# EAGLE board L1panel (EAGLE 7.7.0)
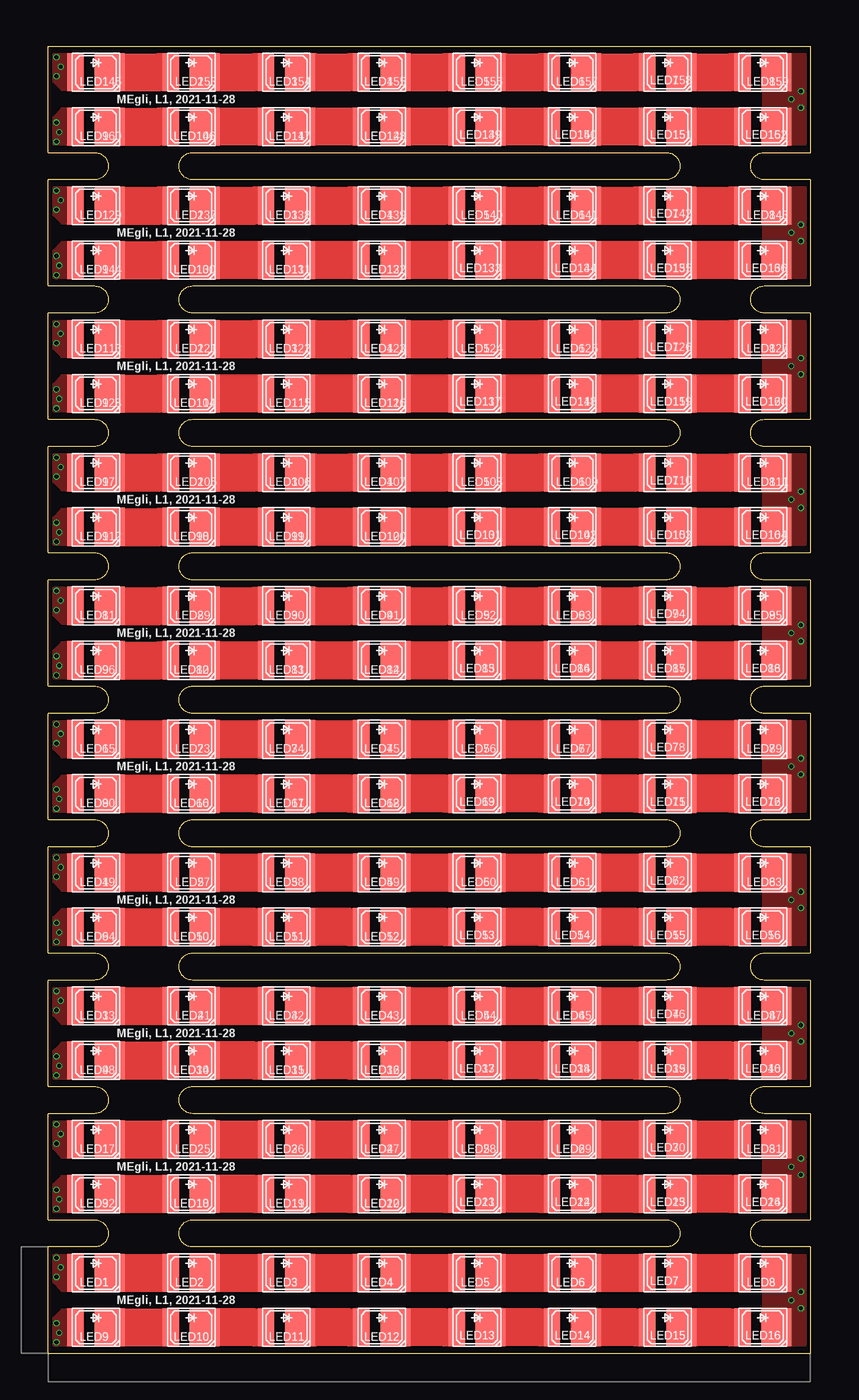
[diagram p0: board, top side]
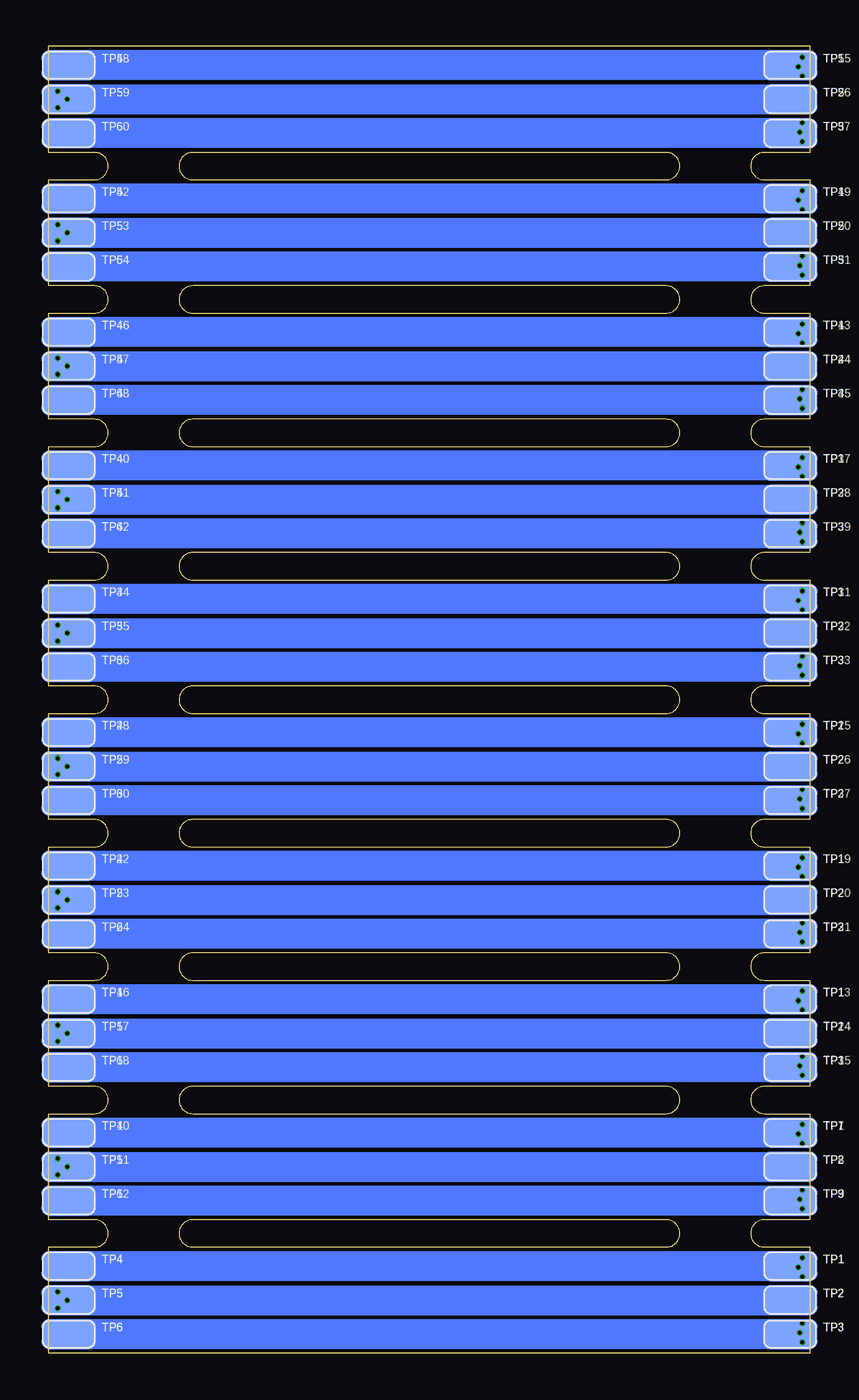
[diagram p1: board, bottom side, seen from below]

Size 56 x 96 mm. Coordinates in mm from the lower left corner, seen from the top.
Outline: 0,0 56,0 56,7.8 52.6,7.8 arc-90 51.6,8.8 arc-90 52.6,9.8 56,9.8 56,17.6 52.6,17.6 arc-90 51.6,18.6 arc-90 52.6,19.6 56,19.6 56,27.4 52.6,27.4 arc-90 51.6,28.4 arc-90 52.6,29.4 56,29.4 56,37.2 52.6,37.2 arc-90 51.6,38.2 arc-90 52.6,39.2 56,39.2 56,47 52.6,47 arc-90 51.6,48 arc-90 52.6,49 56,49 56,56.8 52.6,56.8 arc-90 51.6,57.8 arc-90 52.6,58.8 56,58.8 56,66.6 52.6,66.6 arc-90 51.6,67.6 arc-90 52.6,68.6 56,68.6 56,76.4 52.6,76.4 arc-90 51.6,77.4 arc-90 52.6,78.4 56,78.4 56,86.2 52.6,86.2 arc-90 51.6,87.2 arc-90 52.6,88.2 56,88.2 56,96 0,96 0,88.2 3.4,88.2 arc-90 4.4,87.2 arc-90 3.4,86.2 0,86.2 0,78.4 3.4,78.4 arc-90 4.4,77.4 arc-90 3.4,76.4 0,76.4 0,68.6 3.4,68.6 arc-90 4.4,67.6 arc-90 3.4,66.6 0,66.6 0,58.8 3.4,58.8 arc-90 4.4,57.8 arc-90 3.4,56.8 0,56.8 0,49 3.4,49 arc-90 4.4,48 arc-90 3.4,47 0,47 0,39.2 3.4,39.2 arc-90 4.4,38.2 arc-90 3.4,37.2 0,37.2 0,29.4 3.4,29.4 arc-90 4.4,28.4 arc-90 3.4,27.4 0,27.4 0,19.6 3.4,19.6 arc-90 4.4,18.6 arc-90 3.4,17.6 0,17.6 0,9.8 3.4,9.8 arc-90 4.4,8.8 arc-90 3.4,7.8 0,7.8 0,0
Outline: 45.4,7.8 10.6,7.8 arc-90 9.6,8.8 arc-90 10.6,9.8 45.4,9.8 arc-90 46.4,8.8 arc-90 45.4,7.8
Outline: 45.4,17.6 10.6,17.6 arc-90 9.6,18.6 arc-90 10.6,19.6 45.4,19.6 arc-90 46.4,18.6 arc-90 45.4,17.6
Outline: 45.4,27.4 10.6,27.4 arc-90 9.6,28.4 arc-90 10.6,29.4 45.4,29.4 arc-90 46.4,28.4 arc-90 45.4,27.4
Outline: 45.4,37.2 10.6,37.2 arc-90 9.6,38.2 arc-90 10.6,39.2 45.4,39.2 arc-90 46.4,38.2 arc-90 45.4,37.2
Outline: 45.4,47 10.6,47 arc-90 9.6,48 arc-90 10.6,49 45.4,49 arc-90 46.4,48 arc-90 45.4,47
Outline: 45.4,56.8 10.6,56.8 arc-90 9.6,57.8 arc-90 10.6,58.8 45.4,58.8 arc-90 46.4,57.8 arc-90 45.4,56.8
Outline: 45.4,66.6 10.6,66.6 arc-90 9.6,67.6 arc-90 10.6,68.6 45.4,68.6 arc-90 46.4,67.6 arc-90 45.4,66.6
Outline: 45.4,76.4 10.6,76.4 arc-90 9.6,77.4 arc-90 10.6,78.4 45.4,78.4 arc-90 46.4,77.4 arc-90 45.4,76.4
Outline: 45.4,86.2 10.6,86.2 arc-90 9.6,87.2 arc-90 10.6,88.2 45.4,88.2 arc-90 46.4,87.2 arc-90 45.4,86.2
Copper layers (1*16): Top 0.035mm / dielectric 1.6mm / Bottom 0.035mm
Design rules "jlcpcb-2layers *": minimum track width 5mil, minimum drill 0.3mm, track to track 5mil, track to pad 5mil, pad to pad 5mil, via to via 5mil, smd to smd 5mil, copper to edge 0.2mm, drill to drill 6mil, minimum pad ring 10mil, minimum via ring 3mil, stop-mask expansion 4mil, vias tented up to drill 0.4mm, thermal gap 10mil
tRestrict: 80 lines

## Footprints (pad centres in the part's own frame; a part is rotated, then mirrored left to right if it is on the bottom)
LED_JE2835 = smd 1.2 x 2.8: 1 -1.5,0 | smd 2.2 x 2.8: 2 1,0
PAD_4X2.2MM = smd 4 x 2.2: 1 0,0

## Placement (x,y rotation side)
LED1  [LED_JE2835]  3.5,5.9 0 top
LED2  [LED_JE2835]  10.5,5.9 0 top
LED3  [LED_JE2835]  17.5,5.9 0 top
LED4  [LED_JE2835]  24.5,5.9 0 top
LED5  [LED_JE2835]  31.5,5.9 0 top
LED6  [LED_JE2835]  38.5,5.9 0 top
LED7  [LED_JE2835]  45.5,5.9 0 top
LED8  [LED_JE2835]  52.5,5.9 0 top
LED9  [LED_JE2835]  3.5,1.9 0 top
LED10  [LED_JE2835]  10.5,1.9 0 top
LED11  [LED_JE2835]  17.5,1.9 0 top
LED12  [LED_JE2835]  24.5,1.9 0 top
LED13  [LED_JE2835]  31.5,1.9 0 top
LED14  [LED_JE2835]  38.5,1.9 0 top
LED15  [LED_JE2835]  45.5,1.9 0 top
LED16  [LED_JE2835]  52.5,1.9 0 top
LED17  [LED_JE2835]  3.5,15.7 0 top
LED18  [LED_JE2835]  10.5,11.7 0 top
LED19  [LED_JE2835]  17.5,11.7 0 top
LED20  [LED_JE2835]  24.5,11.7 0 top
LED21  [LED_JE2835]  31.5,11.7 0 top
LED22  [LED_JE2835]  38.5,11.7 0 top
LED23  [LED_JE2835]  45.5,11.7 0 top
LED24  [LED_JE2835]  52.5,11.7 0 top
LED25  [LED_JE2835]  10.5,15.7 0 top
LED26  [LED_JE2835]  17.5,15.7 0 top
LED27  [LED_JE2835]  24.5,15.7 0 top
LED28  [LED_JE2835]  31.5,15.7 0 top
LED29  [LED_JE2835]  38.5,15.7 0 top
LED30  [LED_JE2835]  45.5,15.7 0 top
LED31  [LED_JE2835]  52.5,15.7 0 top
LED32  [LED_JE2835]  3.5,11.7 0 top
LED33  [LED_JE2835]  3.5,25.5 0 top
LED34  [LED_JE2835]  10.5,21.5 0 top
LED35  [LED_JE2835]  17.5,21.5 0 top
LED36  [LED_JE2835]  24.5,21.5 0 top
LED37  [LED_JE2835]  31.5,21.5 0 top
LED38  [LED_JE2835]  38.5,21.5 0 top
LED39  [LED_JE2835]  45.5,21.5 0 top
LED40  [LED_JE2835]  52.5,21.5 0 top
LED41  [LED_JE2835]  10.5,25.5 0 top
LED42  [LED_JE2835]  17.5,25.5 0 top
LED43  [LED_JE2835]  24.5,25.5 0 top
LED44  [LED_JE2835]  31.5,25.5 0 top
LED45  [LED_JE2835]  38.5,25.5 0 top
LED46  [LED_JE2835]  45.5,25.5 0 top
LED47  [LED_JE2835]  52.5,25.5 0 top
LED48  [LED_JE2835]  3.5,21.5 0 top
LED49  [LED_JE2835]  3.5,35.3 0 top
LED50  [LED_JE2835]  10.5,31.3 0 top
LED51  [LED_JE2835]  17.5,31.3 0 top
LED52  [LED_JE2835]  24.5,31.3 0 top
LED53  [LED_JE2835]  31.5,31.3 0 top
LED54  [LED_JE2835]  38.5,31.3 0 top
LED55  [LED_JE2835]  45.5,31.3 0 top
LED56  [LED_JE2835]  52.5,31.3 0 top
LED57  [LED_JE2835]  10.5,35.3 0 top
LED58  [LED_JE2835]  17.5,35.3 0 top
LED59  [LED_JE2835]  24.5,35.3 0 top
LED60  [LED_JE2835]  31.5,35.3 0 top
LED61  [LED_JE2835]  38.5,35.3 0 top
LED62  [LED_JE2835]  45.5,35.3 0 top
LED63  [LED_JE2835]  52.5,35.3 0 top
LED64  [LED_JE2835]  3.5,31.3 0 top
LED65  [LED_JE2835]  3.5,45.1 0 top
LED66  [LED_JE2835]  10.5,41.1 0 top
LED67  [LED_JE2835]  17.5,41.1 0 top
LED68  [LED_JE2835]  24.5,41.1 0 top
LED69  [LED_JE2835]  31.5,41.1 0 top
LED70  [LED_JE2835]  38.5,41.1 0 top
LED71  [LED_JE2835]  45.5,41.1 0 top
LED72  [LED_JE2835]  52.5,41.1 0 top
LED73  [LED_JE2835]  10.5,45.1 0 top
LED74  [LED_JE2835]  17.5,45.1 0 top
LED75  [LED_JE2835]  24.5,45.1 0 top
LED76  [LED_JE2835]  31.5,45.1 0 top
LED77  [LED_JE2835]  38.5,45.1 0 top
LED78  [LED_JE2835]  45.5,45.1 0 top
LED79  [LED_JE2835]  52.5,45.1 0 top
LED80  [LED_JE2835]  3.5,41.1 0 top
LED81  [LED_JE2835]  3.5,54.9 0 top
LED82  [LED_JE2835]  10.5,50.9 0 top
LED83  [LED_JE2835]  17.5,50.9 0 top
LED84  [LED_JE2835]  24.5,50.9 0 top
LED85  [LED_JE2835]  31.5,50.9 0 top
LED86  [LED_JE2835]  38.5,50.9 0 top
LED87  [LED_JE2835]  45.5,50.9 0 top
LED88  [LED_JE2835]  52.5,50.9 0 top
LED89  [LED_JE2835]  10.5,54.9 0 top
LED90  [LED_JE2835]  17.5,54.9 0 top
LED91  [LED_JE2835]  24.5,54.9 0 top
LED92  [LED_JE2835]  31.5,54.9 0 top
LED93  [LED_JE2835]  38.5,54.9 0 top
LED94  [LED_JE2835]  45.5,54.9 0 top
LED95  [LED_JE2835]  52.5,54.9 0 top
LED96  [LED_JE2835]  3.5,50.9 0 top
LED97  [LED_JE2835]  3.5,64.7 0 top
LED98  [LED_JE2835]  10.5,60.7 0 top
LED99  [LED_JE2835]  17.5,60.7 0 top
LED100  [LED_JE2835]  24.5,60.7 0 top
LED101  [LED_JE2835]  31.5,60.7 0 top
LED102  [LED_JE2835]  38.5,60.7 0 top
LED103  [LED_JE2835]  45.5,60.7 0 top
LED104  [LED_JE2835]  52.5,60.7 0 top
LED105  [LED_JE2835]  10.5,64.7 0 top
LED106  [LED_JE2835]  17.5,64.7 0 top
LED107  [LED_JE2835]  24.5,64.7 0 top
LED108  [LED_JE2835]  31.5,64.7 0 top
LED109  [LED_JE2835]  38.5,64.7 0 top
LED110  [LED_JE2835]  45.5,64.7 0 top
LED111  [LED_JE2835]  52.5,64.7 0 top
LED112  [LED_JE2835]  3.5,60.7 0 top
LED113  [LED_JE2835]  3.5,74.5 0 top
LED114  [LED_JE2835]  10.5,70.5 0 top
LED115  [LED_JE2835]  17.5,70.5 0 top
LED116  [LED_JE2835]  24.5,70.5 0 top
LED117  [LED_JE2835]  31.5,70.5 0 top
LED118  [LED_JE2835]  38.5,70.5 0 top
LED119  [LED_JE2835]  45.5,70.5 0 top
LED120  [LED_JE2835]  52.5,70.5 0 top
LED121  [LED_JE2835]  10.5,74.5 0 top
LED122  [LED_JE2835]  17.5,74.5 0 top
LED123  [LED_JE2835]  24.5,74.5 0 top
LED124  [LED_JE2835]  31.5,74.5 0 top
LED125  [LED_JE2835]  38.5,74.5 0 top
LED126  [LED_JE2835]  45.5,74.5 0 top
LED127  [LED_JE2835]  52.5,74.5 0 top
LED128  [LED_JE2835]  3.5,70.5 0 top
LED129  [LED_JE2835]  3.5,84.3 0 top
LED130  [LED_JE2835]  10.5,80.3 0 top
LED131  [LED_JE2835]  17.5,80.3 0 top
LED132  [LED_JE2835]  24.5,80.3 0 top
LED133  [LED_JE2835]  31.5,80.3 0 top
LED134  [LED_JE2835]  38.5,80.3 0 top
LED135  [LED_JE2835]  45.5,80.3 0 top
LED136  [LED_JE2835]  52.5,80.3 0 top
LED137  [LED_JE2835]  10.5,84.3 0 top
LED138  [LED_JE2835]  17.5,84.3 0 top
LED139  [LED_JE2835]  24.5,84.3 0 top
LED140  [LED_JE2835]  31.5,84.3 0 top
LED141  [LED_JE2835]  38.5,84.3 0 top
LED142  [LED_JE2835]  45.5,84.3 0 top
LED143  [LED_JE2835]  52.5,84.3 0 top
LED144  [LED_JE2835]  3.5,80.3 0 top
LED145  [LED_JE2835]  3.5,94.1 0 top
LED146  [LED_JE2835]  10.5,90.1 0 top
LED147  [LED_JE2835]  17.5,90.1 0 top
LED148  [LED_JE2835]  24.5,90.1 0 top
LED149  [LED_JE2835]  31.5,90.1 0 top
LED150  [LED_JE2835]  38.5,90.1 0 top
LED151  [LED_JE2835]  45.5,90.1 0 top
LED152  [LED_JE2835]  52.5,90.1 0 top
LED153  [LED_JE2835]  10.5,94.1 0 top
LED154  [LED_JE2835]  17.5,94.1 0 top
LED155  [LED_JE2835]  24.5,94.1 0 top
LED156  [LED_JE2835]  31.5,94.1 0 top
LED157  [LED_JE2835]  38.5,94.1 0 top
LED158  [LED_JE2835]  45.5,94.1 0 top
LED159  [LED_JE2835]  52.5,94.1 0 top
LED160  [LED_JE2835]  3.5,90.1 0 top
TP1  A1  [PAD_4X2.2MM]  1.5,6.4 0 bottom
TP2  KCOM  [PAD_4X2.2MM]  1.5,3.9 0 bottom
TP3  A2  [PAD_4X2.2MM]  1.5,1.4 0 bottom
TP4  A1  [PAD_4X2.2MM]  54.5,6.4 0 bottom
TP5  KCOM  [PAD_4X2.2MM]  54.5,3.9 0 bottom
TP6  A2  [PAD_4X2.2MM]  54.5,1.4 0 bottom
TP7  A1  [PAD_4X2.2MM]  1.5,16.2 0 bottom
TP8  KCOM  [PAD_4X2.2MM]  1.5,13.7 0 bottom
TP9  A2  [PAD_4X2.2MM]  1.5,11.2 0 bottom
TP10  A1  [PAD_4X2.2MM]  54.5,16.2 0 bottom
TP11  KCOM  [PAD_4X2.2MM]  54.5,13.7 0 bottom
TP12  A2  [PAD_4X2.2MM]  54.5,11.2 0 bottom
TP13  A1  [PAD_4X2.2MM]  1.5,26 0 bottom
TP14  KCOM  [PAD_4X2.2MM]  1.5,23.5 0 bottom
TP15  A2  [PAD_4X2.2MM]  1.5,21 0 bottom
TP16  A1  [PAD_4X2.2MM]  54.5,26 0 bottom
TP17  KCOM  [PAD_4X2.2MM]  54.5,23.5 0 bottom
TP18  A2  [PAD_4X2.2MM]  54.5,21 0 bottom
TP19  A1  [PAD_4X2.2MM]  1.5,35.8 0 bottom
TP20  KCOM  [PAD_4X2.2MM]  1.5,33.3 0 bottom
TP21  A2  [PAD_4X2.2MM]  1.5,30.8 0 bottom
TP22  A1  [PAD_4X2.2MM]  54.5,35.8 0 bottom
TP23  KCOM  [PAD_4X2.2MM]  54.5,33.3 0 bottom
TP24  A2  [PAD_4X2.2MM]  54.5,30.8 0 bottom
TP25  A1  [PAD_4X2.2MM]  1.5,45.6 0 bottom
TP26  KCOM  [PAD_4X2.2MM]  1.5,43.1 0 bottom
TP27  A2  [PAD_4X2.2MM]  1.5,40.6 0 bottom
TP28  A1  [PAD_4X2.2MM]  54.5,45.6 0 bottom
TP29  KCOM  [PAD_4X2.2MM]  54.5,43.1 0 bottom
TP30  A2  [PAD_4X2.2MM]  54.5,40.6 0 bottom
TP31  A1  [PAD_4X2.2MM]  1.5,55.4 0 bottom
TP32  KCOM  [PAD_4X2.2MM]  1.5,52.9 0 bottom
TP33  A2  [PAD_4X2.2MM]  1.5,50.4 0 bottom
TP34  A1  [PAD_4X2.2MM]  54.5,55.4 0 bottom
TP35  KCOM  [PAD_4X2.2MM]  54.5,52.9 0 bottom
TP36  A2  [PAD_4X2.2MM]  54.5,50.4 0 bottom
TP37  A1  [PAD_4X2.2MM]  1.5,65.2 0 bottom
TP38  KCOM  [PAD_4X2.2MM]  1.5,62.7 0 bottom
TP39  A2  [PAD_4X2.2MM]  1.5,60.2 0 bottom
TP40  A1  [PAD_4X2.2MM]  54.5,65.2 0 bottom
TP41  KCOM  [PAD_4X2.2MM]  54.5,62.7 0 bottom
TP42  A2  [PAD_4X2.2MM]  54.5,60.2 0 bottom
TP43  A1  [PAD_4X2.2MM]  1.5,75 0 bottom
TP44  KCOM  [PAD_4X2.2MM]  1.5,72.5 0 bottom
TP45  A2  [PAD_4X2.2MM]  1.5,70 0 bottom
TP46  A1  [PAD_4X2.2MM]  54.5,75 0 bottom
TP47  KCOM  [PAD_4X2.2MM]  54.5,72.5 0 bottom
TP48  A2  [PAD_4X2.2MM]  54.5,70 0 bottom
TP49  A1  [PAD_4X2.2MM]  1.5,84.8 0 bottom
TP50  KCOM  [PAD_4X2.2MM]  1.5,82.3 0 bottom
TP51  A2  [PAD_4X2.2MM]  1.5,79.8 0 bottom
TP52  A1  [PAD_4X2.2MM]  54.5,84.8 0 bottom
TP53  KCOM  [PAD_4X2.2MM]  54.5,82.3 0 bottom
TP54  A2  [PAD_4X2.2MM]  54.5,79.8 0 bottom
TP55  A1  [PAD_4X2.2MM]  1.5,94.6 0 bottom
TP56  KCOM  [PAD_4X2.2MM]  1.5,92.1 0 bottom
TP57  A2  [PAD_4X2.2MM]  1.5,89.6 0 bottom
TP58  A1  [PAD_4X2.2MM]  54.5,94.6 0 bottom
TP59  KCOM  [PAD_4X2.2MM]  54.5,92.1 0 bottom
TP60  A2  [PAD_4X2.2MM]  54.5,89.6 0 bottom

## Library data of the parts
LED1-LED160 TP1-TP60 = megli

## Nets
A1: LED1.1 TP1.1 TP4.1
A2: LED9.1 TP3.1 TP6.1
A3: LED17.1 TP7.1 TP10.1
A4: LED32.1 TP9.1 TP12.1
A5: LED33.1 TP13.1 TP16.1
A6: LED48.1 TP15.1 TP18.1
A7: LED49.1 TP19.1 TP22.1
A8: LED64.1 TP21.1 TP24.1
A9: LED65.1 TP25.1 TP28.1
A10: LED80.1 TP27.1 TP30.1
A11: LED81.1 TP31.1 TP34.1
A12: LED96.1 TP33.1 TP36.1
A13: LED97.1 TP37.1 TP40.1
A14: LED112.1 TP39.1 TP42.1
A15: LED113.1 TP43.1 TP46.1
A16: LED128.1 TP45.1 TP48.1
A17: LED129.1 TP49.1 TP52.1
A18: LED144.1 TP51.1 TP54.1
A19: LED145.1 TP55.1 TP58.1
A20: LED160.1 TP57.1 TP60.1
KCOM: LED8.2 LED16.2 TP2.1 TP5.1
KCOM1: LED24.2 LED31.2 TP8.1 TP11.1
KCOM2: LED40.2 LED47.2 TP14.1 TP17.1
KCOM3: LED56.2 LED63.2 TP20.1 TP23.1
KCOM4: LED72.2 LED79.2 TP26.1 TP29.1
KCOM5: LED88.2 LED95.2 TP32.1 TP35.1
KCOM6: LED104.2 LED111.2 TP38.1 TP41.1
KCOM7: LED120.2 LED127.2 TP44.1 TP47.1
KCOM8: LED136.2 LED143.2 TP50.1 TP53.1
KCOM9: LED152.2 LED159.2 TP56.1 TP59.1
N$1: LED1.2 LED2.1
N$2: LED2.2 LED3.1
N$3: LED3.2 LED4.1
N$4: LED4.2 LED5.1
N$5: LED5.2 LED6.1
N$6: LED6.2 LED7.1
N$7: LED7.2 LED8.1
N$8: LED9.2 LED10.1
N$9: LED10.2 LED11.1
N$10: LED11.2 LED12.1
N$11: LED12.2 LED13.1
N$12: LED13.2 LED14.1
N$13: LED14.2 LED15.1
N$14: LED15.2 LED16.1
N$15: LED17.2 LED25.1
N$16: LED25.2 LED26.1
N$17: LED26.2 LED27.1
N$18: LED27.2 LED28.1
N$19: LED28.2 LED29.1
N$20: LED29.2 LED30.1
N$21: LED30.2 LED31.1
N$22: LED18.1 LED32.2
N$23: LED18.2 LED19.1
N$24: LED19.2 LED20.1
N$25: LED20.2 LED21.1
N$26: LED21.2 LED22.1
N$27: LED22.2 LED23.1
N$28: LED23.2 LED24.1
N$29: LED33.2 LED41.1
N$30: LED41.2 LED42.1
N$31: LED42.2 LED43.1
N$32: LED43.2 LED44.1
N$33: LED44.2 LED45.1
N$34: LED45.2 LED46.1
N$35: LED46.2 LED47.1
N$36: LED34.1 LED48.2
N$37: LED34.2 LED35.1
N$38: LED35.2 LED36.1
N$39: LED36.2 LED37.1
N$40: LED37.2 LED38.1
N$41: LED38.2 LED39.1
N$42: LED39.2 LED40.1
N$43: LED49.2 LED57.1
N$44: LED57.2 LED58.1
N$45: LED58.2 LED59.1
N$46: LED59.2 LED60.1
N$47: LED60.2 LED61.1
N$48: LED61.2 LED62.1
N$49: LED62.2 LED63.1
N$50: LED50.1 LED64.2
N$51: LED50.2 LED51.1
N$52: LED51.2 LED52.1
N$53: LED52.2 LED53.1
N$54: LED53.2 LED54.1
N$55: LED54.2 LED55.1
N$56: LED55.2 LED56.1
N$57: LED65.2 LED73.1
N$58: LED73.2 LED74.1
N$59: LED74.2 LED75.1
N$60: LED75.2 LED76.1
N$61: LED76.2 LED77.1
N$62: LED77.2 LED78.1
N$63: LED78.2 LED79.1
N$64: LED66.1 LED80.2
N$65: LED66.2 LED67.1
N$66: LED67.2 LED68.1
N$67: LED68.2 LED69.1
N$68: LED69.2 LED70.1
N$69: LED70.2 LED71.1
N$70: LED71.2 LED72.1
N$71: LED81.2 LED89.1
N$72: LED89.2 LED90.1
N$73: LED90.2 LED91.1
N$74: LED91.2 LED92.1
N$75: LED92.2 LED93.1
N$76: LED93.2 LED94.1
N$77: LED94.2 LED95.1
N$78: LED82.1 LED96.2
N$79: LED82.2 LED83.1
N$80: LED83.2 LED84.1
N$81: LED84.2 LED85.1
N$82: LED85.2 LED86.1
N$83: LED86.2 LED87.1
N$84: LED87.2 LED88.1
N$85: LED97.2 LED105.1
N$86: LED105.2 LED106.1
N$87: LED106.2 LED107.1
N$88: LED107.2 LED108.1
N$89: LED108.2 LED109.1
N$90: LED109.2 LED110.1
N$91: LED110.2 LED111.1
N$92: LED98.1 LED112.2
N$93: LED98.2 LED99.1
N$94: LED99.2 LED100.1
N$95: LED100.2 LED101.1
N$96: LED101.2 LED102.1
N$97: LED102.2 LED103.1
N$98: LED103.2 LED104.1
N$99: LED113.2 LED121.1
N$100: LED121.2 LED122.1
N$101: LED122.2 LED123.1
N$102: LED123.2 LED124.1
N$103: LED124.2 LED125.1
N$104: LED125.2 LED126.1
N$105: LED126.2 LED127.1
N$106: LED114.1 LED128.2
N$107: LED114.2 LED115.1
N$108: LED115.2 LED116.1
N$109: LED116.2 LED117.1
N$110: LED117.2 LED118.1
N$111: LED118.2 LED119.1
N$112: LED119.2 LED120.1
N$113: LED129.2 LED137.1
N$114: LED137.2 LED138.1
N$115: LED138.2 LED139.1
N$116: LED139.2 LED140.1
N$117: LED140.2 LED141.1
N$118: LED141.2 LED142.1
N$119: LED142.2 LED143.1
N$120: LED130.1 LED144.2
N$121: LED130.2 LED131.1
N$122: LED131.2 LED132.1
N$123: LED132.2 LED133.1
N$124: LED133.2 LED134.1
N$125: LED134.2 LED135.1
N$126: LED135.2 LED136.1
N$127: LED145.2 LED153.1
N$128: LED153.2 LED154.1
N$129: LED154.2 LED155.1
N$130: LED155.2 LED156.1
N$131: LED156.2 LED157.1
N$132: LED157.2 LED158.1
N$133: LED158.2 LED159.1
N$134: LED146.1 LED160.2
N$135: LED146.2 LED147.1
N$136: LED147.2 LED148.1
N$137: LED148.2 LED149.1
N$138: LED149.2 LED150.1
N$139: LED150.2 LED151.1
N$140: LED151.2 LED152.1

## Tracks (layer width: path | path; a pad name or v marks a point on that pad's centre or on a via)
A1  (via drill 0.3)
  Bottom 0.2: TP1.1 0.7,6.4
  Bottom 1: 0.7,6.4 0.9,6.4 v0.9,6.3
  Bottom 2.2: TP1.1 TP4.1
  other vias: 0.6,5.6 0.6,7
  pour Top (no thermals): 2.5,7.2 0.4,7.2 0.4,5.2 1,4.6 2.5,4.6
A2  (via drill 0.3)
  Bottom 0.2: TP3.1 0.7,1.4
  Bottom 1: 0.7,1.4 0.8,1.4 v0.8,1.5
  Bottom 2.2: TP3.1 TP6.1
  other vias: 0.6,2.2 0.6,0.8
  pour Top (no thermals): 2.5,3.2 2.5,0.6 0.4,0.6 0.4,2.6 1,3.2
A3  (via drill 0.3)
  Bottom 0.2: TP7.1 0.7,16.2
  Bottom 1: 0.7,16.2 0.9,16.2 v0.9,16.1
  Bottom 2.2: TP7.1 TP10.1
  other vias: 0.6,15.4 0.6,16.8
  pour Top (no thermals): 2.5,17 0.4,17 0.4,15 1,14.4 2.5,14.4
A4  (via drill 0.3)
  Bottom 0.2: TP9.1 0.7,11.2
  Bottom 1: 0.7,11.2 0.8,11.2 v0.8,11.3
  Bottom 2.2: TP9.1 TP12.1
  other vias: 0.6,12 0.6,10.6
  pour Top (no thermals): 2.5,13 2.5,10.4 0.4,10.4 0.4,12.4 1,13
A5  (via drill 0.3)
  Bottom 0.2: TP13.1 0.7,26
  Bottom 1: 0.7,26 0.9,26 v0.9,25.9
  Bottom 2.2: TP13.1 TP16.1
  other vias: 0.6,25.2 0.6,26.6
  pour Top (no thermals): 2.5,26.8 0.4,26.8 0.4,24.8 1,24.2 2.5,24.2
A6  (via drill 0.3)
  Bottom 0.2: TP15.1 0.7,21
  Bottom 1: 0.7,21 0.8,21 v0.8,21.1
  Bottom 2.2: TP15.1 TP18.1
  other vias: 0.6,21.8 0.6,20.4
  pour Top (no thermals): 2.5,22.8 2.5,20.2 0.4,20.2 0.4,22.2 1,22.8
A7  (via drill 0.3)
  Bottom 0.2: TP19.1 0.7,35.8
  Bottom 1: 0.7,35.8 0.9,35.8 v0.9,35.7
  Bottom 2.2: TP19.1 TP22.1
  other vias: 0.6,35 0.6,36.4
  pour Top (no thermals): 2.5,36.6 0.4,36.6 0.4,34.6 1,34 2.5,34
A8  (via drill 0.3)
  Bottom 0.2: TP21.1 0.7,30.8
  Bottom 1: 0.7,30.8 0.8,30.8 v0.8,30.9
  Bottom 2.2: TP21.1 TP24.1
  other vias: 0.6,31.6 0.6,30.2
  pour Top (no thermals): 2.5,32.6 2.5,30 0.4,30 0.4,32 1,32.6
A9  (via drill 0.3)
  Bottom 0.2: TP25.1 0.7,45.6
  Bottom 1: 0.7,45.6 0.9,45.6 v0.9,45.5
  Bottom 2.2: TP25.1 TP28.1
  other vias: 0.6,44.8 0.6,46.2
  pour Top (no thermals): 2.5,46.4 0.4,46.4 0.4,44.4 1,43.8 2.5,43.8
A10  (via drill 0.3)
  Bottom 0.2: TP27.1 0.7,40.6
  Bottom 1: 0.7,40.6 0.8,40.6 v0.8,40.7
  Bottom 2.2: TP27.1 TP30.1
  other vias: 0.6,41.4 0.6,40
  pour Top (no thermals): 2.5,42.4 2.5,39.8 0.4,39.8 0.4,41.8 1,42.4
A11  (via drill 0.3)
  Bottom 0.2: TP31.1 0.7,55.4
  Bottom 1: 0.7,55.4 0.9,55.4 v0.9,55.3
  Bottom 2.2: TP31.1 TP34.1
  other vias: 0.6,54.6 0.6,56
  pour Top (no thermals): 2.5,56.2 0.4,56.2 0.4,54.2 1,53.6 2.5,53.6
A12  (via drill 0.3)
  Bottom 0.2: TP33.1 0.7,50.4
  Bottom 1: 0.7,50.4 0.8,50.4 v0.8,50.5
  Bottom 2.2: TP33.1 TP36.1
  other vias: 0.6,51.2 0.6,49.8
  pour Top (no thermals): 2.5,52.2 2.5,49.6 0.4,49.6 0.4,51.6 1,52.2
A13  (via drill 0.3)
  Bottom 0.2: TP37.1 0.7,65.2
  Bottom 1: 0.7,65.2 0.9,65.2 v0.9,65.1
  Bottom 2.2: TP37.1 TP40.1
  other vias: 0.6,64.4 0.6,65.8
  pour Top (no thermals): 2.5,66 0.4,66 0.4,64 1,63.4 2.5,63.4
A14  (via drill 0.3)
  Bottom 0.2: TP39.1 0.7,60.2
  Bottom 1: 0.7,60.2 0.8,60.2 v0.8,60.3
  Bottom 2.2: TP39.1 TP42.1
  other vias: 0.6,61 0.6,59.6
  pour Top (no thermals): 2.5,62 2.5,59.4 0.4,59.4 0.4,61.4 1,62
A15  (via drill 0.3)
  Bottom 0.2: TP43.1 0.7,75
  Bottom 1: 0.7,75 0.9,75 v0.9,74.9
  Bottom 2.2: TP43.1 TP46.1
  other vias: 0.6,74.2 0.6,75.6
  pour Top (no thermals): 2.5,75.8 0.4,75.8 0.4,73.8 1,73.2 2.5,73.2
A16  (via drill 0.3)
  Bottom 0.2: TP45.1 0.7,70
  Bottom 1: 0.7,70 0.8,70 v0.8,70.1
  Bottom 2.2: TP45.1 TP48.1
  other vias: 0.6,70.8 0.6,69.4
  pour Top (no thermals): 2.5,71.8 2.5,69.2 0.4,69.2 0.4,71.2 1,71.8
A17  (via drill 0.3)
  Bottom 0.2: TP49.1 0.7,84.8
  Bottom 1: 0.7,84.8 0.9,84.8 v0.9,84.7
  Bottom 2.2: TP49.1 TP52.1
  other vias: 0.6,84 0.6,85.4
  pour Top (no thermals): 2.5,85.6 0.4,85.6 0.4,83.6 1,83 2.5,83
A18  (via drill 0.3)
  Bottom 0.2: TP51.1 0.7,79.8
  Bottom 1: 0.7,79.8 0.8,79.8 v0.8,79.9
  Bottom 2.2: TP51.1 TP54.1
  other vias: 0.6,80.6 0.6,79.2
  pour Top (no thermals): 2.5,81.6 2.5,79 0.4,79 0.4,81 1,81.6
A19  (via drill 0.3)
  Bottom 0.2: TP55.1 0.7,94.6
  Bottom 1: 0.7,94.6 0.9,94.6 v0.9,94.5
  Bottom 2.2: TP55.1 TP58.1
  other vias: 0.6,93.8 0.6,95.2
  pour Top (no thermals): 2.5,95.4 0.4,95.4 0.4,93.4 1,92.8 2.5,92.8
A20  (via drill 0.3)
  Bottom 0.2: TP57.1 0.7,89.6
  Bottom 1: 0.7,89.6 0.8,89.6 v0.8,89.7
  Bottom 2.2: TP57.1 TP60.1
  other vias: 0.6,90.4 0.6,89
  pour Top (no thermals): 2.5,91.4 2.5,88.8 0.4,88.8 0.4,90.8 1,91.4
KCOM  (via drill 0.3)
  Bottom 0.2: TP5.1 55.3,3.9 v55.3,4.5
  Bottom 2.2: TP5.1 TP2.1
  other vias: 55.3,3.3 54.6,3.9
  pour Top (no thermals): 52.5,7.2 52.5,0.6 55.6,0.6 55.6,7.2
KCOM1  (via drill 0.3)
  Bottom 0.2: TP11.1 55.3,13.7 v55.3,14.3
  Bottom 2.2: TP11.1 TP8.1
  other vias: 55.3,13.1 54.6,13.7
  pour Top (no thermals): 52.5,17 52.5,10.4 55.6,10.4 55.6,17
KCOM2  (via drill 0.3)
  Bottom 0.2: TP17.1 55.3,23.5 v55.3,24.1
  Bottom 2.2: TP17.1 TP14.1
  other vias: 55.3,22.9 54.6,23.5
  pour Top (no thermals): 52.5,26.8 52.5,20.2 55.6,20.2 55.6,26.8
KCOM3  (via drill 0.3)
  Bottom 0.2: TP23.1 55.3,33.3 v55.3,33.9
  Bottom 2.2: TP23.1 TP20.1
  other vias: 55.3,32.7 54.6,33.3
  pour Top (no thermals): 52.5,36.6 52.5,30 55.6,30 55.6,36.6
KCOM4  (via drill 0.3)
  Bottom 0.2: TP29.1 55.3,43.1 v55.3,43.7
  Bottom 2.2: TP29.1 TP26.1
  other vias: 55.3,42.5 54.6,43.1
  pour Top (no thermals): 52.5,46.4 52.5,39.8 55.6,39.8 55.6,46.4
KCOM5  (via drill 0.3)
  Bottom 0.2: TP35.1 55.3,52.9 v55.3,53.5
  Bottom 2.2: TP35.1 TP32.1
  other vias: 55.3,52.3 54.6,52.9
  pour Top (no thermals): 52.5,56.2 52.5,49.6 55.6,49.6 55.6,56.2
KCOM6  (via drill 0.3)
  Bottom 0.2: TP41.1 55.3,62.7 v55.3,63.3
  Bottom 2.2: TP41.1 TP38.1
  other vias: 55.3,62.1 54.6,62.7
  pour Top (no thermals): 52.5,66 52.5,59.4 55.6,59.4 55.6,66
KCOM7  (via drill 0.3)
  Bottom 0.2: TP47.1 55.3,72.5 v55.3,73.1
  Bottom 2.2: TP47.1 TP44.1
  other vias: 55.3,71.9 54.6,72.5
  pour Top (no thermals): 52.5,75.8 52.5,69.2 55.6,69.2 55.6,75.8
KCOM8  (via drill 0.3)
  Bottom 0.2: TP53.1 55.3,82.3 v55.3,82.9
  Bottom 2.2: TP53.1 TP50.1
  other vias: 55.3,81.7 54.6,82.3
  pour Top (no thermals): 52.5,85.6 52.5,79 55.6,79 55.6,85.6
KCOM9  (via drill 0.3)
  Bottom 0.2: TP59.1 55.3,92.1 v55.3,92.7
  Bottom 2.2: TP59.1 TP56.1
  other vias: 55.3,91.5 54.6,92.1
  pour Top (no thermals): 52.5,95.4 52.5,88.8 55.6,88.8 55.6,95.4
N$1
  Top 1: LED1.2 5.3,5.9 | 8.2,5.9 LED2.1
  Top 2.8: 5.3,5.9 8.2,5.9
N$2
  Top 1: LED2.2 12.1,5.9 | 15.2,5.9 LED3.1
  Top 2.8: 12.1,5.9 15.2,5.9
N$3
  Top 1: LED3.2 19.5,5.9 | 22.2,5.9 LED4.1
  Top 2.8: 19.5,5.9 22.2,5.9
N$4
  Top 1: LED4.2 26.2,5.9 | 29.2,5.9 LED5.1
  Top 2.8: 26.2,5.9 29.2,5.9
N$5
  Top 1: LED5.2 33.5,5.9 | 36.2,5.9 LED6.1
  Top 2.8: 33.5,5.9 36.2,5.9
N$6
  Top 1: LED6.2 40,5.9 | 43.2,5.9 LED7.1
  Top 2.8: 40,5.9 43.2,5.9
N$7
  Top 1: LED7.2 47.1,5.9 | 50.2,5.9 LED8.1
  Top 2.8: 47.1,5.9 50.2,5.9
N$8
  Top 1: LED9.2 4.8,1.9 | 8.2,1.9 LED10.1
  Top 2.8: 4.8,1.9 8.2,1.9
N$9
  Top 1: LED11.1 15.2,1.9 | 12.2,1.9 LED10.2
  Top 2.8: 15.2,1.9 12.2,1.9
N$10
  Top 1: LED12.1 22.2,1.9 | 19.5,1.9 LED11.2
  Top 2.8: 22.2,1.9 19.5,1.9
N$11
  Top 1: LED13.1 29.2,1.9 | 26.4,1.9 LED12.2
  Top 2.8: 29.2,1.9 26.4,1.9
N$12
  Top 1: LED14.1 36.2,1.9 | 33.3,1.9 LED13.2
  Top 2.8: 36.2,1.9 33.3,1.9
N$13
  Top 1: LED15.1 43.2,1.9 | 40.1,1.9 LED14.2
  Top 2.8: 43.2,1.9 40.1,1.9
N$14
  Top 1: LED16.1 50.2,1.9 | 47.1,1.9 LED15.2
  Top 2.8: 50.2,1.9 47.1,1.9
N$15
  Top 1: LED17.2 5.3,15.7 | 8.2,15.7 LED25.1
  Top 2.8: 5.3,15.7 8.2,15.7
N$16
  Top 1: LED25.2 12.1,15.7 | 15.2,15.7 LED26.1
  Top 2.8: 12.1,15.7 15.2,15.7
N$17
  Top 1: LED26.2 19.5,15.7 | 22.2,15.7 LED27.1
  Top 2.8: 19.5,15.7 22.2,15.7
N$18
  Top 1: LED27.2 26.2,15.7 | 29.2,15.7 LED28.1
  Top 2.8: 26.2,15.7 29.2,15.7
N$19
  Top 1: LED28.2 33.5,15.7 | 36.2,15.7 LED29.1
  Top 2.8: 33.5,15.7 36.2,15.7
N$20
  Top 1: LED29.2 40,15.7 | 43.2,15.7 LED30.1
  Top 2.8: 40,15.7 43.2,15.7
N$21
  Top 1: LED30.2 47.1,15.7 | 50.2,15.7 LED31.1
  Top 2.8: 47.1,15.7 50.2,15.7
N$22
  Top 1: LED32.2 4.8,11.7 | 8.2,11.7 LED18.1
  Top 2.8: 4.8,11.7 8.2,11.7
N$23
  Top 1: LED19.1 15.2,11.7 | 12.2,11.7 LED18.2
  Top 2.8: 15.2,11.7 12.2,11.7
N$24
  Top 1: LED20.1 22.2,11.7 | 19.5,11.7 LED19.2
  Top 2.8: 22.2,11.7 19.5,11.7
N$25
  Top 1: LED21.1 29.2,11.7 | 26.4,11.7 LED20.2
  Top 2.8: 29.2,11.7 26.4,11.7
N$26
  Top 1: LED22.1 36.2,11.7 | 33.3,11.7 LED21.2
  Top 2.8: 36.2,11.7 33.3,11.7
N$27
  Top 1: LED23.1 43.2,11.7 | 40.1,11.7 LED22.2
  Top 2.8: 43.2,11.7 40.1,11.7
N$28
  Top 1: LED24.1 50.2,11.7 | 47.1,11.7 LED23.2
  Top 2.8: 50.2,11.7 47.1,11.7
N$29
  Top 1: LED33.2 5.3,25.5 | 8.2,25.5 LED41.1
  Top 2.8: 5.3,25.5 8.2,25.5
N$30
  Top 1: LED41.2 12.1,25.5 | 15.2,25.5 LED42.1
  Top 2.8: 12.1,25.5 15.2,25.5
N$31
  Top 1: LED42.2 19.5,25.5 | 22.2,25.5 LED43.1
  Top 2.8: 19.5,25.5 22.2,25.5
N$32
  Top 1: LED43.2 26.2,25.5 | 29.2,25.5 LED44.1
  Top 2.8: 26.2,25.5 29.2,25.5
N$33
  Top 1: LED44.2 33.5,25.5 | 36.2,25.5 LED45.1
  Top 2.8: 33.5,25.5 36.2,25.5
N$34
  Top 1: LED45.2 40,25.5 | 43.2,25.5 LED46.1
  Top 2.8: 40,25.5 43.2,25.5
N$35
  Top 1: LED46.2 47.1,25.5 | 50.2,25.5 LED47.1
  Top 2.8: 47.1,25.5 50.2,25.5
N$36
  Top 1: LED48.2 4.8,21.5 | 8.2,21.5 LED34.1
  Top 2.8: 4.8,21.5 8.2,21.5
N$37
  Top 1: LED35.1 15.2,21.5 | 12.2,21.5 LED34.2
  Top 2.8: 15.2,21.5 12.2,21.5
N$38
  Top 1: LED36.1 22.2,21.5 | 19.5,21.5 LED35.2
  Top 2.8: 22.2,21.5 19.5,21.5
N$39
  Top 1: LED37.1 29.2,21.5 | 26.4,21.5 LED36.2
  Top 2.8: 29.2,21.5 26.4,21.5
N$40
  Top 1: LED38.1 36.2,21.5 | 33.3,21.5 LED37.2
  Top 2.8: 36.2,21.5 33.3,21.5
N$41
  Top 1: LED39.1 43.2,21.5 | 40.1,21.5 LED38.2
  Top 2.8: 43.2,21.5 40.1,21.5
N$42
  Top 1: LED40.1 50.2,21.5 | 47.1,21.5 LED39.2
  Top 2.8: 50.2,21.5 47.1,21.5
N$43
  Top 1: LED49.2 5.3,35.3 | 8.2,35.3 LED57.1
  Top 2.8: 5.3,35.3 8.2,35.3
N$44
  Top 1: LED57.2 12.1,35.3 | 15.2,35.3 LED58.1
  Top 2.8: 12.1,35.3 15.2,35.3
N$45
  Top 1: LED58.2 19.5,35.3 | 22.2,35.3 LED59.1
  Top 2.8: 19.5,35.3 22.2,35.3
N$46
  Top 1: LED59.2 26.2,35.3 | 29.2,35.3 LED60.1
  Top 2.8: 26.2,35.3 29.2,35.3
N$47
  Top 1: LED60.2 33.5,35.3 | 36.2,35.3 LED61.1
  Top 2.8: 33.5,35.3 36.2,35.3
N$48
  Top 1: LED61.2 40,35.3 | 43.2,35.3 LED62.1
  Top 2.8: 40,35.3 43.2,35.3
N$49
  Top 1: LED62.2 47.1,35.3 | 50.2,35.3 LED63.1
  Top 2.8: 47.1,35.3 50.2,35.3
N$50
  Top 1: LED64.2 4.8,31.3 | 8.2,31.3 LED50.1
  Top 2.8: 4.8,31.3 8.2,31.3
N$51
  Top 1: LED51.1 15.2,31.3 | 12.2,31.3 LED50.2
  Top 2.8: 15.2,31.3 12.2,31.3
N$52
  Top 1: LED52.1 22.2,31.3 | 19.5,31.3 LED51.2
  Top 2.8: 22.2,31.3 19.5,31.3
N$53
  Top 1: LED53.1 29.2,31.3 | 26.4,31.3 LED52.2
  Top 2.8: 29.2,31.3 26.4,31.3
N$54
  Top 1: LED54.1 36.2,31.3 | 33.3,31.3 LED53.2
  Top 2.8: 36.2,31.3 33.3,31.3
N$55
  Top 1: LED55.1 43.2,31.3 | 40.1,31.3 LED54.2
  Top 2.8: 43.2,31.3 40.1,31.3
N$56
  Top 1: LED56.1 50.2,31.3 | 47.1,31.3 LED55.2
  Top 2.8: 50.2,31.3 47.1,31.3
N$57
  Top 1: LED65.2 5.3,45.1 | 8.2,45.1 LED73.1
  Top 2.8: 5.3,45.1 8.2,45.1
N$58
  Top 1: LED73.2 12.1,45.1 | 15.2,45.1 LED74.1
  Top 2.8: 12.1,45.1 15.2,45.1
N$59
  Top 1: LED74.2 19.5,45.1 | 22.2,45.1 LED75.1
  Top 2.8: 19.5,45.1 22.2,45.1
N$60
  Top 1: LED75.2 26.2,45.1 | 29.2,45.1 LED76.1
  Top 2.8: 26.2,45.1 29.2,45.1
N$61
  Top 1: LED76.2 33.5,45.1 | 36.2,45.1 LED77.1
  Top 2.8: 33.5,45.1 36.2,45.1
N$62
  Top 1: LED77.2 40,45.1 | 43.2,45.1 LED78.1
  Top 2.8: 40,45.1 43.2,45.1
N$63
  Top 1: LED78.2 47.1,45.1 | 50.2,45.1 LED79.1
  Top 2.8: 47.1,45.1 50.2,45.1
N$64
  Top 1: LED80.2 4.8,41.1 | 8.2,41.1 LED66.1
  Top 2.8: 4.8,41.1 8.2,41.1
N$65
  Top 1: LED67.1 15.2,41.1 | 12.2,41.1 LED66.2
  Top 2.8: 15.2,41.1 12.2,41.1
N$66
  Top 1: LED68.1 22.2,41.1 | 19.5,41.1 LED67.2
  Top 2.8: 22.2,41.1 19.5,41.1
N$67
  Top 1: LED69.1 29.2,41.1 | 26.4,41.1 LED68.2
  Top 2.8: 29.2,41.1 26.4,41.1
N$68
  Top 1: LED70.1 36.2,41.1 | 33.3,41.1 LED69.2
  Top 2.8: 36.2,41.1 33.3,41.1
N$69
  Top 1: LED71.1 43.2,41.1 | 40.1,41.1 LED70.2
  Top 2.8: 43.2,41.1 40.1,41.1
N$70
  Top 1: LED72.1 50.2,41.1 | 47.1,41.1 LED71.2
  Top 2.8: 50.2,41.1 47.1,41.1
N$71
  Top 1: LED81.2 5.3,54.9 | 8.2,54.9 LED89.1
  Top 2.8: 5.3,54.9 8.2,54.9
N$72
  Top 1: LED89.2 12.1,54.9 | 15.2,54.9 LED90.1
  Top 2.8: 12.1,54.9 15.2,54.9
N$73
  Top 1: LED90.2 19.5,54.9 | 22.2,54.9 LED91.1
  Top 2.8: 19.5,54.9 22.2,54.9
N$74
  Top 1: LED91.2 26.2,54.9 | 29.2,54.9 LED92.1
  Top 2.8: 26.2,54.9 29.2,54.9
N$75
  Top 1: LED92.2 33.5,54.9 | 36.2,54.9 LED93.1
  Top 2.8: 33.5,54.9 36.2,54.9
N$76
  Top 1: LED93.2 40,54.9 | 43.2,54.9 LED94.1
  Top 2.8: 40,54.9 43.2,54.9
N$77
  Top 1: LED94.2 47.1,54.9 | 50.2,54.9 LED95.1
  Top 2.8: 47.1,54.9 50.2,54.9
N$78
  Top 1: LED96.2 4.8,50.9 | 8.2,50.9 LED82.1
  Top 2.8: 4.8,50.9 8.2,50.9
N$79
  Top 1: LED83.1 15.2,50.9 | 12.2,50.9 LED82.2
  Top 2.8: 15.2,50.9 12.2,50.9
N$80
  Top 1: LED84.1 22.2,50.9 | 19.5,50.9 LED83.2
  Top 2.8: 22.2,50.9 19.5,50.9
N$81
  Top 1: LED85.1 29.2,50.9 | 26.4,50.9 LED84.2
  Top 2.8: 29.2,50.9 26.4,50.9
N$82
  Top 1: LED86.1 36.2,50.9 | 33.3,50.9 LED85.2
  Top 2.8: 36.2,50.9 33.3,50.9
N$83
  Top 1: LED87.1 43.2,50.9 | 40.1,50.9 LED86.2
  Top 2.8: 43.2,50.9 40.1,50.9
N$84
  Top 1: LED88.1 50.2,50.9 | 47.1,50.9 LED87.2
  Top 2.8: 50.2,50.9 47.1,50.9
N$85
  Top 1: LED97.2 5.3,64.7 | 8.2,64.7 LED105.1
  Top 2.8: 5.3,64.7 8.2,64.7
N$86
  Top 1: LED105.2 12.1,64.7 | 15.2,64.7 LED106.1
  Top 2.8: 12.1,64.7 15.2,64.7
N$87
  Top 1: LED106.2 19.5,64.7 | 22.2,64.7 LED107.1
  Top 2.8: 19.5,64.7 22.2,64.7
N$88
  Top 1: LED107.2 26.2,64.7 | 29.2,64.7 LED108.1
  Top 2.8: 26.2,64.7 29.2,64.7
N$89
  Top 1: LED108.2 33.5,64.7 | 36.2,64.7 LED109.1
  Top 2.8: 33.5,64.7 36.2,64.7
N$90
  Top 1: LED109.2 40,64.7 | 43.2,64.7 LED110.1
  Top 2.8: 40,64.7 43.2,64.7
N$91
  Top 1: LED110.2 47.1,64.7 | 50.2,64.7 LED111.1
  Top 2.8: 47.1,64.7 50.2,64.7
N$92
  Top 1: LED112.2 4.8,60.7 | 8.2,60.7 LED98.1
  Top 2.8: 4.8,60.7 8.2,60.7
N$93
  Top 1: LED99.1 15.2,60.7 | 12.2,60.7 LED98.2
  Top 2.8: 15.2,60.7 12.2,60.7
N$94
  Top 1: LED100.1 22.2,60.7 | 19.5,60.7 LED99.2
  Top 2.8: 22.2,60.7 19.5,60.7
N$95
  Top 1: LED101.1 29.2,60.7 | 26.4,60.7 LED100.2
  Top 2.8: 29.2,60.7 26.4,60.7
N$96
  Top 1: LED102.1 36.2,60.7 | 33.3,60.7 LED101.2
  Top 2.8: 36.2,60.7 33.3,60.7
N$97
  Top 1: LED103.1 43.2,60.7 | 40.1,60.7 LED102.2
  Top 2.8: 43.2,60.7 40.1,60.7
N$98
  Top 1: LED104.1 50.2,60.7 | 47.1,60.7 LED103.2
  Top 2.8: 50.2,60.7 47.1,60.7
N$99
  Top 1: LED113.2 5.3,74.5 | 8.2,74.5 LED121.1
  Top 2.8: 5.3,74.5 8.2,74.5
N$100
  Top 1: LED121.2 12.1,74.5 | 15.2,74.5 LED122.1
  Top 2.8: 12.1,74.5 15.2,74.5
N$101
  Top 1: LED122.2 19.5,74.5 | 22.2,74.5 LED123.1
  Top 2.8: 19.5,74.5 22.2,74.5
N$102
  Top 1: LED123.2 26.2,74.5 | 29.2,74.5 LED124.1
  Top 2.8: 26.2,74.5 29.2,74.5
N$103
  Top 1: LED124.2 33.5,74.5 | 36.2,74.5 LED125.1
  Top 2.8: 33.5,74.5 36.2,74.5
N$104
  Top 1: LED125.2 40,74.5 | 43.2,74.5 LED126.1
  Top 2.8: 40,74.5 43.2,74.5
N$105
  Top 1: LED126.2 47.1,74.5 | 50.2,74.5 LED127.1
  Top 2.8: 47.1,74.5 50.2,74.5
N$106
  Top 1: LED128.2 4.8,70.5 | 8.2,70.5 LED114.1
  Top 2.8: 4.8,70.5 8.2,70.5
N$107
  Top 1: LED115.1 15.2,70.5 | 12.2,70.5 LED114.2
  Top 2.8: 15.2,70.5 12.2,70.5
N$108
  Top 1: LED116.1 22.2,70.5 | 19.5,70.5 LED115.2
  Top 2.8: 22.2,70.5 19.5,70.5
N$109
  Top 1: LED117.1 29.2,70.5 | 26.4,70.5 LED116.2
  Top 2.8: 29.2,70.5 26.4,70.5
N$110
  Top 1: LED118.1 36.2,70.5 | 33.3,70.5 LED117.2
  Top 2.8: 36.2,70.5 33.3,70.5
N$111
  Top 1: LED119.1 43.2,70.5 | 40.1,70.5 LED118.2
  Top 2.8: 43.2,70.5 40.1,70.5
N$112
  Top 1: LED120.1 50.2,70.5 | 47.1,70.5 LED119.2
  Top 2.8: 50.2,70.5 47.1,70.5
N$113
  Top 1: LED129.2 5.3,84.3 | 8.2,84.3 LED137.1
  Top 2.8: 5.3,84.3 8.2,84.3
N$114
  Top 1: LED137.2 12.1,84.3 | 15.2,84.3 LED138.1
  Top 2.8: 12.1,84.3 15.2,84.3
N$115
  Top 1: LED138.2 19.5,84.3 | 22.2,84.3 LED139.1
  Top 2.8: 19.5,84.3 22.2,84.3
N$116
  Top 1: LED139.2 26.2,84.3 | 29.2,84.3 LED140.1
  Top 2.8: 26.2,84.3 29.2,84.3
N$117
  Top 1: LED140.2 33.5,84.3 | 36.2,84.3 LED141.1
  Top 2.8: 33.5,84.3 36.2,84.3
N$118
  Top 1: LED141.2 40,84.3 | 43.2,84.3 LED142.1
  Top 2.8: 40,84.3 43.2,84.3
N$119
  Top 1: LED142.2 47.1,84.3 | 50.2,84.3 LED143.1
  Top 2.8: 47.1,84.3 50.2,84.3
N$120
  Top 1: LED144.2 4.8,80.3 | 8.2,80.3 LED130.1
  Top 2.8: 4.8,80.3 8.2,80.3
N$121
  Top 1: LED131.1 15.2,80.3 | 12.2,80.3 LED130.2
  Top 2.8: 15.2,80.3 12.2,80.3
N$122
  Top 1: LED132.1 22.2,80.3 | 19.5,80.3 LED131.2
  Top 2.8: 22.2,80.3 19.5,80.3
N$123
  Top 1: LED133.1 29.2,80.3 | 26.4,80.3 LED132.2
  Top 2.8: 29.2,80.3 26.4,80.3
N$124
  Top 1: LED134.1 36.2,80.3 | 33.3,80.3 LED133.2
  Top 2.8: 36.2,80.3 33.3,80.3
N$125
  Top 1: LED135.1 43.2,80.3 | 40.1,80.3 LED134.2
  Top 2.8: 43.2,80.3 40.1,80.3
N$126
  Top 1: LED136.1 50.2,80.3 | 47.1,80.3 LED135.2
  Top 2.8: 50.2,80.3 47.1,80.3
N$127
  Top 1: LED145.2 5.3,94.1 | 8.2,94.1 LED153.1
  Top 2.8: 5.3,94.1 8.2,94.1
N$128
  Top 1: LED153.2 12.1,94.1 | 15.2,94.1 LED154.1
  Top 2.8: 12.1,94.1 15.2,94.1
N$129
  Top 1: LED154.2 19.5,94.1 | 22.2,94.1 LED155.1
  Top 2.8: 19.5,94.1 22.2,94.1
N$130
  Top 1: LED155.2 26.2,94.1 | 29.2,94.1 LED156.1
  Top 2.8: 26.2,94.1 29.2,94.1
N$131
  Top 1: LED156.2 33.5,94.1 | 36.2,94.1 LED157.1
  Top 2.8: 33.5,94.1 36.2,94.1
N$132
  Top 1: LED157.2 40,94.1 | 43.2,94.1 LED158.1
  Top 2.8: 40,94.1 43.2,94.1
N$133
  Top 1: LED158.2 47.1,94.1 | 50.2,94.1 LED159.1
  Top 2.8: 47.1,94.1 50.2,94.1
N$134
  Top 1: LED160.2 4.8,90.1 | 8.2,90.1 LED146.1
  Top 2.8: 4.8,90.1 8.2,90.1
N$135
  Top 1: LED147.1 15.2,90.1 | 12.2,90.1 LED146.2
  Top 2.8: 15.2,90.1 12.2,90.1
N$136
  Top 1: LED148.1 22.2,90.1 | 19.5,90.1 LED147.2
  Top 2.8: 22.2,90.1 19.5,90.1
N$137
  Top 1: LED149.1 29.2,90.1 | 26.4,90.1 LED148.2
  Top 2.8: 29.2,90.1 26.4,90.1
N$138
  Top 1: LED150.1 36.2,90.1 | 33.3,90.1 LED149.2
  Top 2.8: 36.2,90.1 33.3,90.1
N$139
  Top 1: LED151.1 43.2,90.1 | 40.1,90.1 LED150.2
  Top 2.8: 43.2,90.1 40.1,90.1
N$140
  Top 1: LED152.1 50.2,90.1 | 47.1,90.1 LED151.2
  Top 2.8: 50.2,90.1 47.1,90.1

## Text on the board
tPlace: MEgli, L1, 2021-11-28 | MEgli, L1, 2021-11-28 | MEgli, L1, 2021-11-28 | MEgli, L1, 2021-11-28 | MEgli, L1, 2021-11-28 | MEgli, L1, 2021-11-28 | MEgli, L1, 2021-11-28 | MEgli, L1, 2021-11-28 | MEgli, L1, 2021-11-28 | MEgli, L1, 2021-11-28
_tNames: LED1 | LED2 | LED3 | LED4 | LED5 | LED6 | LED7 | LED8 | LED9 | LED10 | LED11 | LED12 | LED13 | LED14 | LED15 | LED16 | LED1 | LED2 | LED3 | LED4 | LED5 | LED6 | LED7 | LED8 | LED9 | LED10 | LED11 | LED12 | LED13 | LED14 | LED15 | LED16 | LED7 | LED1 | LED2 | LED3 | LED4 | LED5 | LED6 | LED8 | LED13 | LED14 | LED15 | LED16 | LED9 | LED10 | LED11 | LED12 | LED1 | LED2 | LED3 | LED4 | LED5 | LED6 | LED7 | LED8 | LED9 | LED10 | LED11 | LED12 | LED13 | LED14 | LED15 | LED16 | LED1 | LED2 | LED3 | LED4 | LED5 | LED6 | LED7 | LED8 | LED9 | LED10 | LED11 | LED12 | LED13 | LED14 | LED15 | LED16 | LED1 | LED2 | LED3 | LED4 | LED5 | LED6 | LED7 | LED8 | LED9 | LED10 | LED11 | LED12 | LED13 | LED14 | LED15 | LED16 | LED1 | LED2 | LED3 | LED4 | LED5 | LED6 | LED7 | LED8 | LED9 | LED10 | LED11 | LED12 | LED13 | LED14 | LED15 | LED16 | LED7 | LED1 | LED2 | LED3 | LED4 | LED5 | LED6 | LED8 | LED13 | LED14 | LED15 | LED16 | LED9 | LED10 | LED11 | LED12 | LED1 | LED2 | LED3 | LED4 | LED5 | LED6 | LED7 | LED8 | LED9 | LED10 | LED11 | LED12 | LED13 | LED14 | LED15 | LED16 | LED1 | LED2 | LED3 | LED4 | LED5 | LED6 | LED7 | LED8 | LED9 | LED10 | LED11 | LED12 | LED13 | LED14 | LED15 | LED16
_bNames: TP1 | TP4 | TP2 | TP5 | TP3 | TP6 | TP1 | TP4 | TP2 | TP5 | TP3 | TP6 | TP1 | TP4 | TP2 | TP5 | TP3 | TP6 | TP1 | TP4 | TP2 | TP5 | TP3 | TP6 | TP1 | TP4 | TP2 | TP5 | TP3 | TP6 | TP1 | TP4 | TP2 | TP5 | TP3 | TP6 | TP1 | TP4 | TP2 | TP5 | TP3 | TP6 | TP1 | TP4 | TP2 | TP5 | TP3 | TP6 | TP1 | TP4 | TP2 | TP5 | TP3 | TP6 | TP1 | TP4 | TP2 | TP5 | TP3 | TP6